# Altium PCB PCB1.PcbDoc
Units mil, origin at the board's own origin, x right, y up, seen from the top; angles counter-clockwise.
Board outline 2527.03 x 2742.03 mil, 2 copper layers (Top Layer, Bottom Layer); 62 components, 61 nets, 262 pads, 308 vias.
Unrouted connection lines stored in the file: 6.
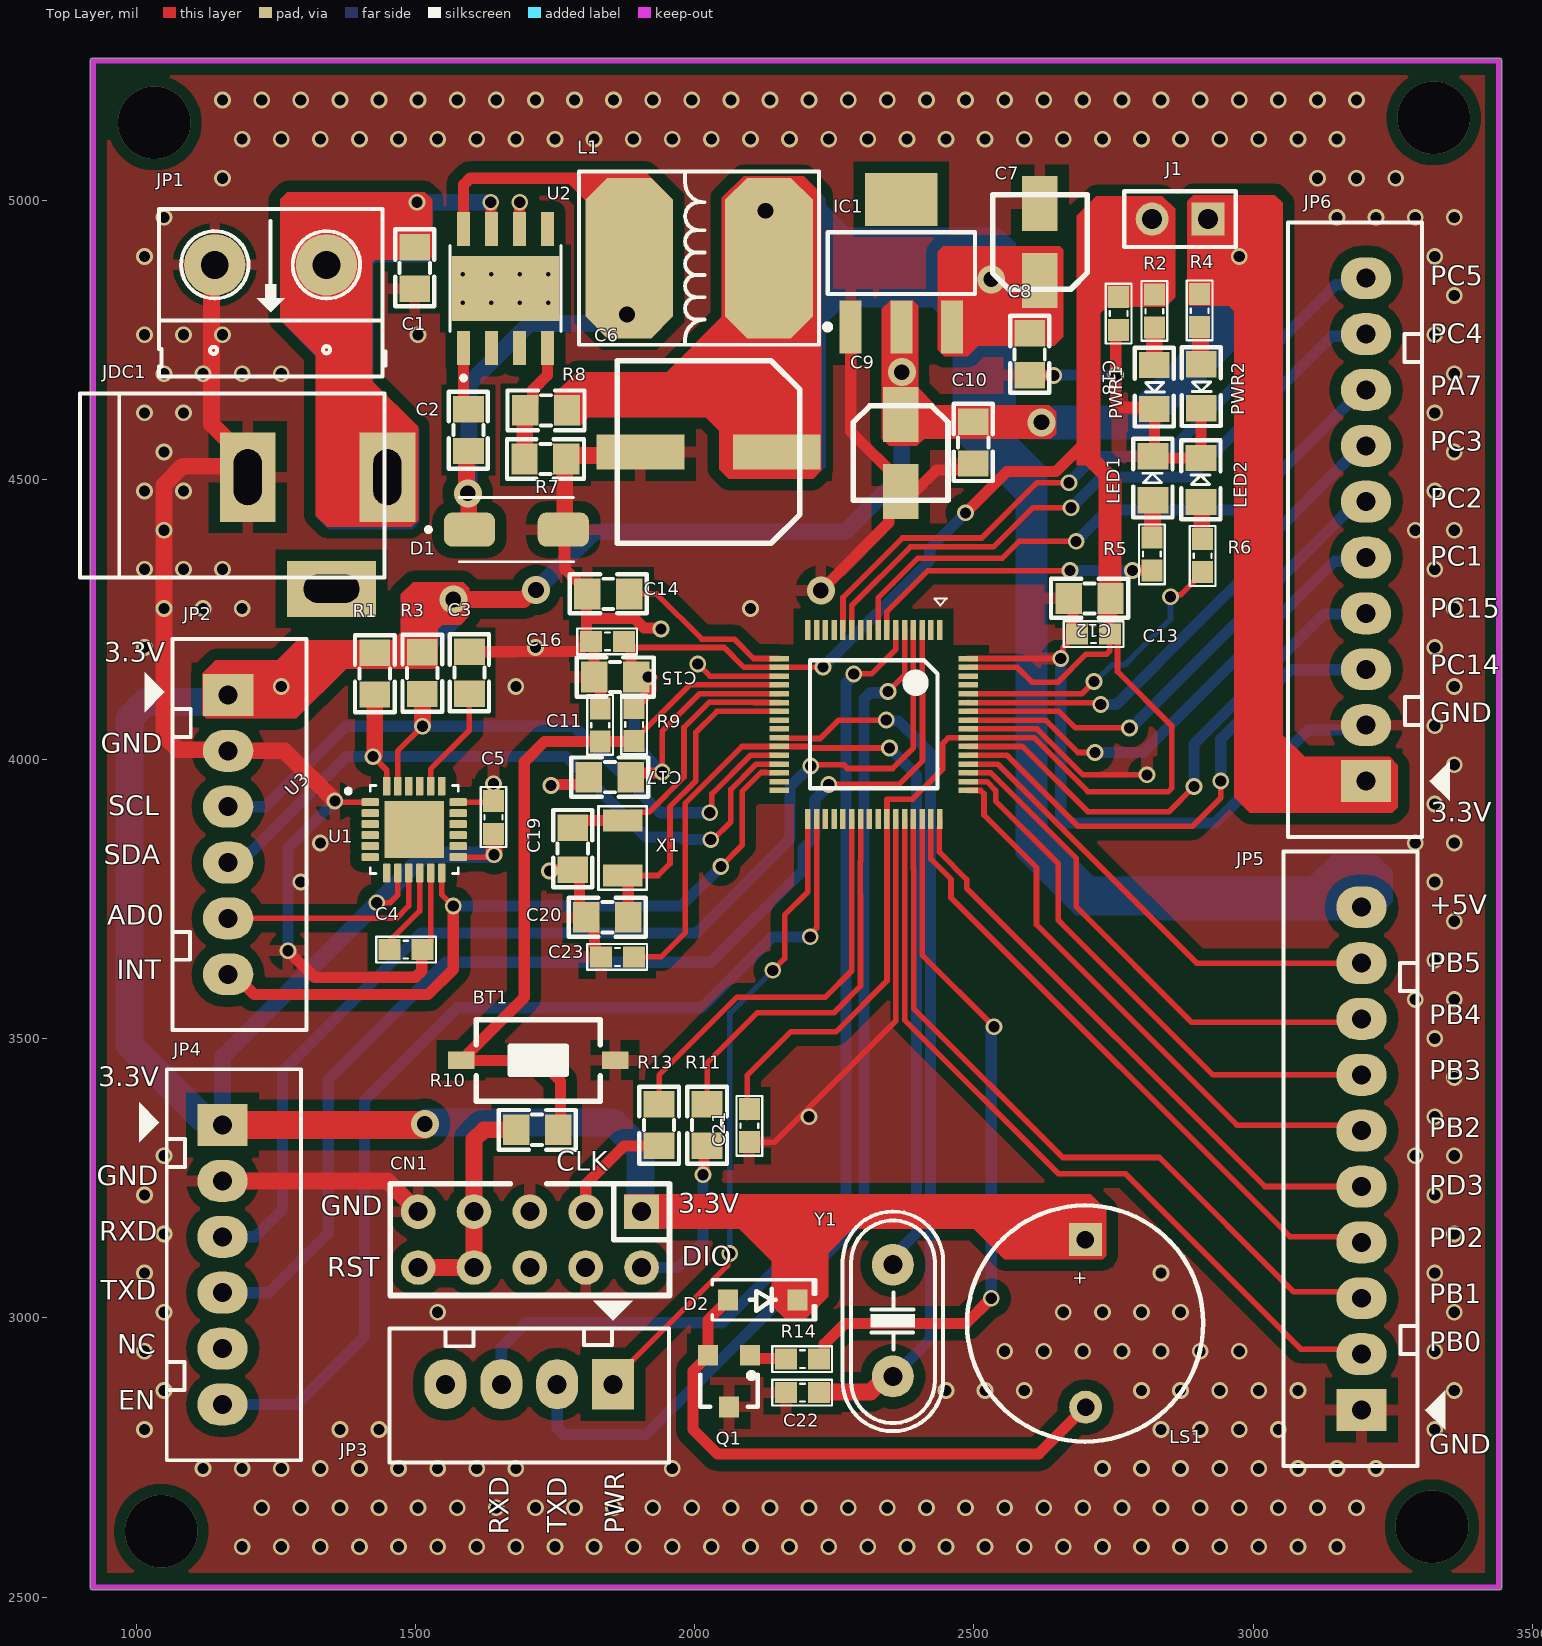
[diagram p0: Top Layer view]
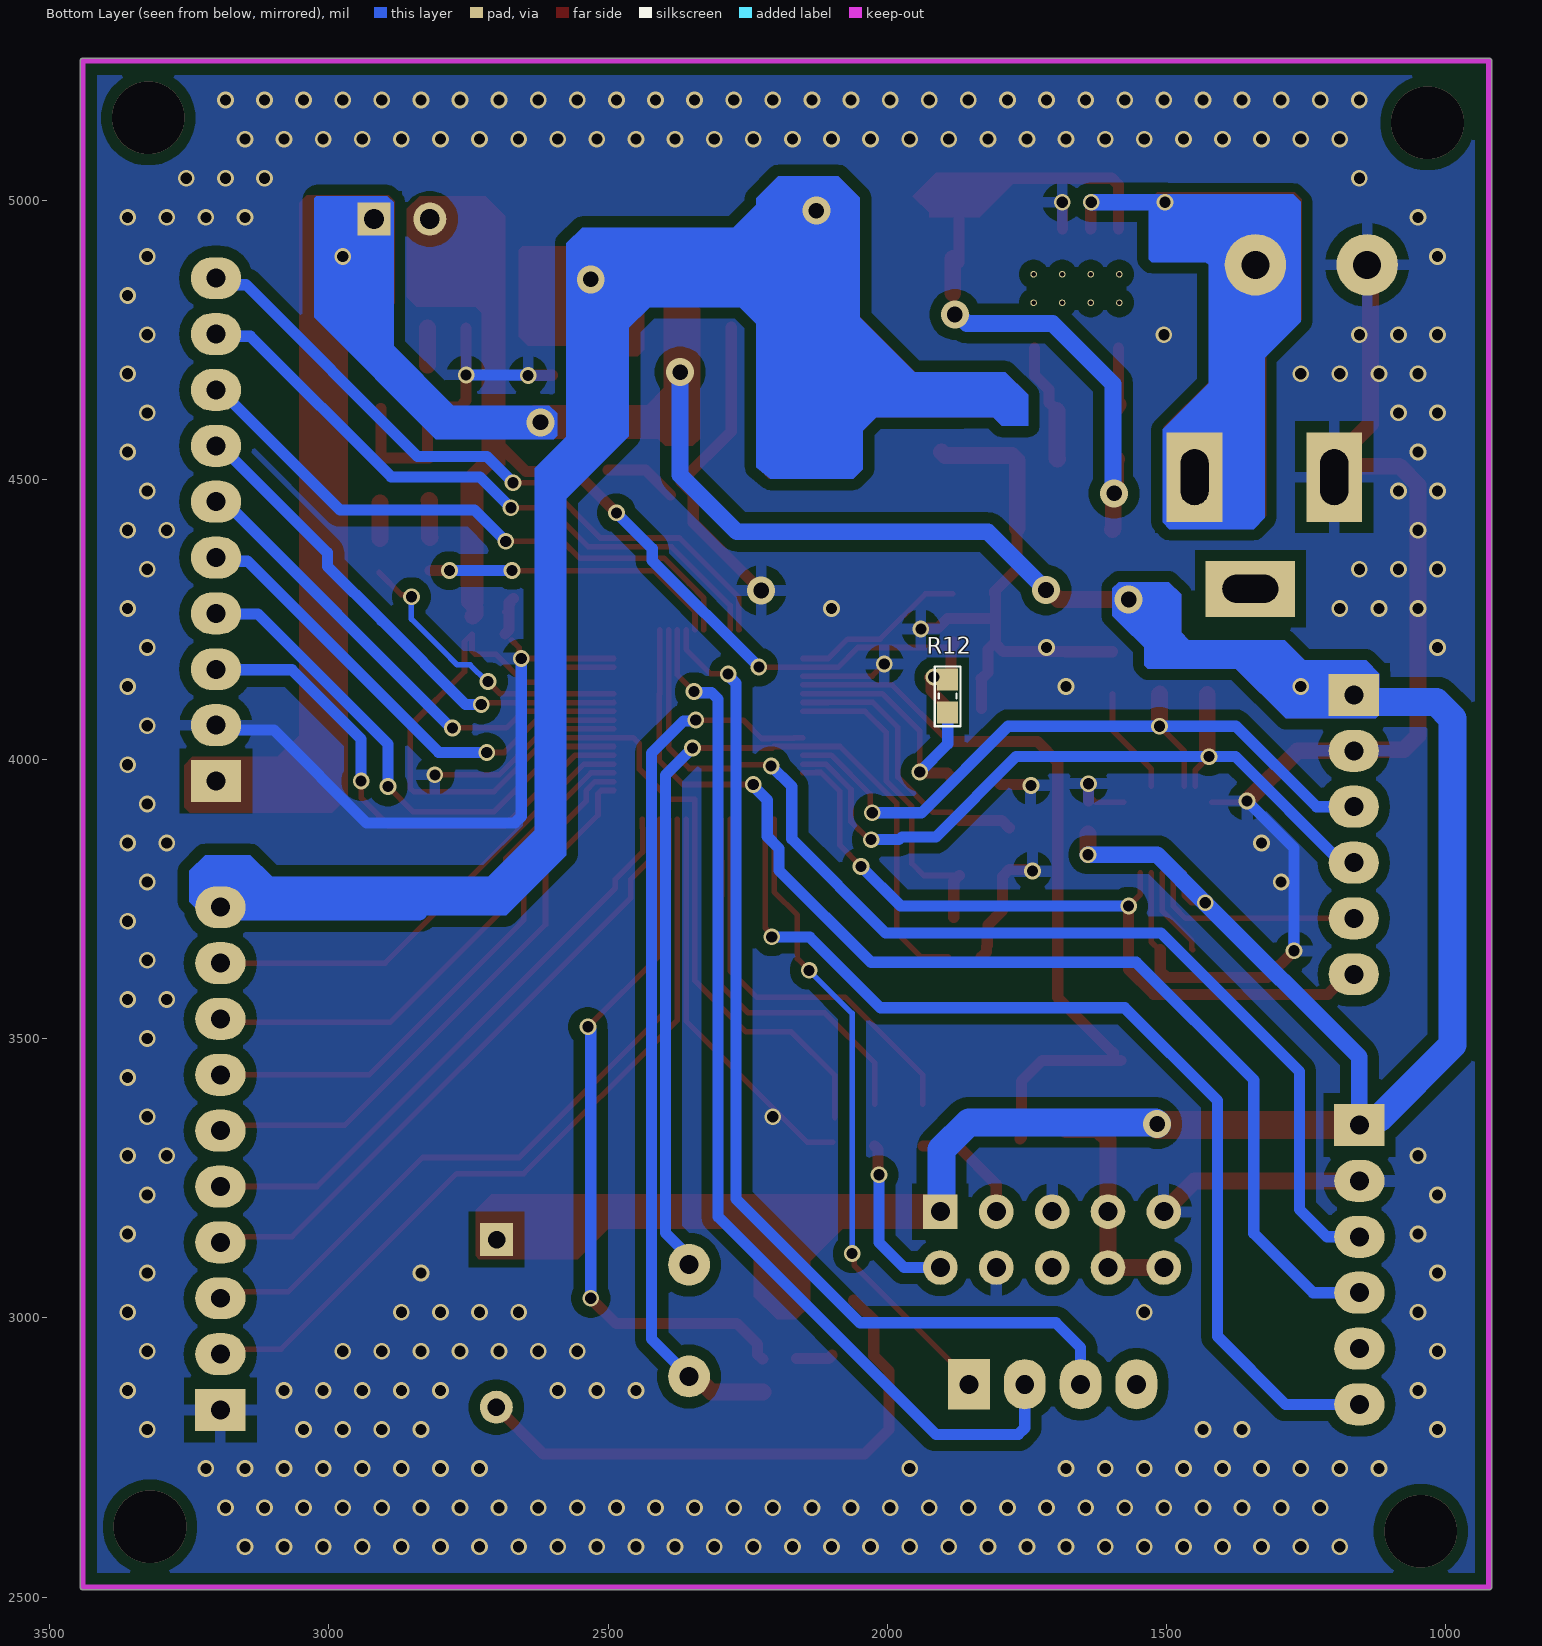
[diagram p1: Bottom Layer view, seen from below]
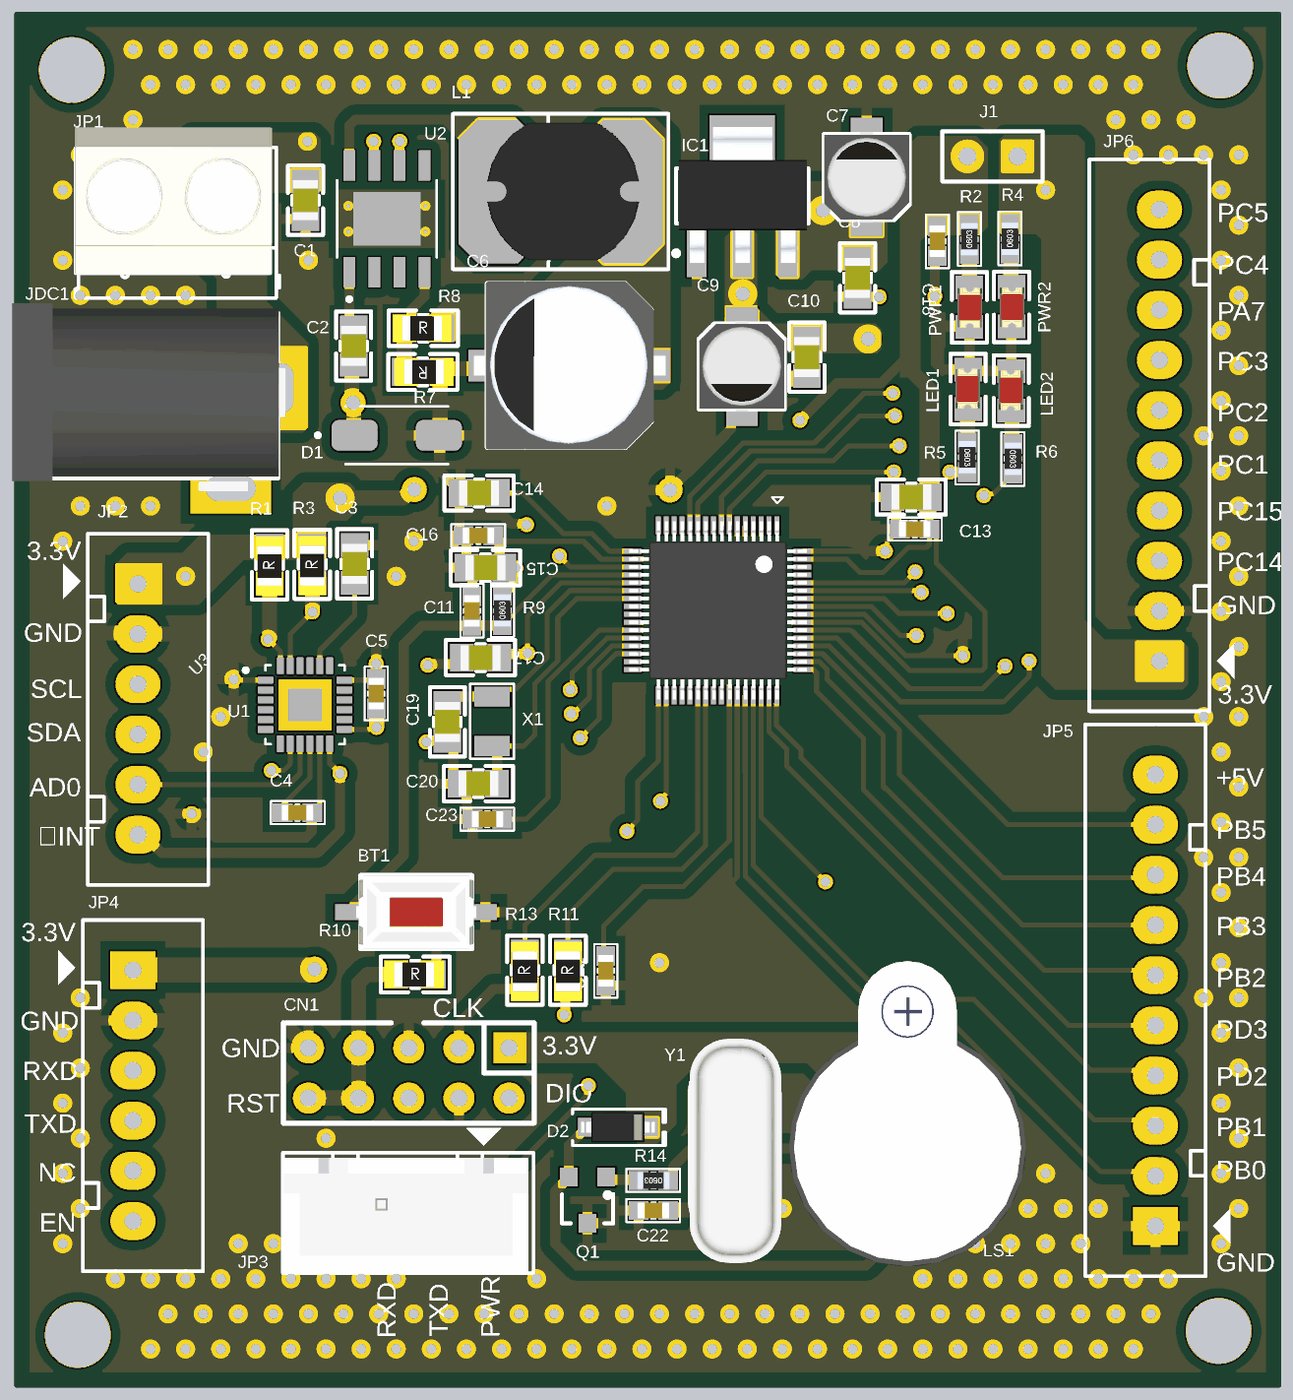
[diagram p2: 3D render of the assembled board from above, using the file's embedded part models]

## Layer stack, top to bottom
Top Solder: solder mask 0.4, Solder Resist, Dk 3.5
Top Layer: signal copper 1.4
Dielectric 1: dielectric 12.6, FR-4, Dk 4.8
Bottom Layer: signal copper 1.4
Bottom Solder: solder mask 0.4, Solder Resist, Dk 3.5

## Board outline
917.99,2518 917.98,5250 cw(c923,5250) 923,5255.02 3440,5255.02 cw(c3440,5250) 3445.01,5250 3445.02,2518 cw(c3440,2518) 3440,2512.99 923,2512.99 cw(c923,2518)

## Design rules (kind name [scope] priority, off if disabled: settings)
Clearance Clearance_9 [InNamedPolygon('GND_L02_P000')] p1: gap=10 ignorepadtopadclearanceinfootprint=FALSE except(0: Arc-Hole Track-Hole SMDPad-Hole THPad-Hole Via-Hole Fill-Hole Poly-Hole Region-Hole Text-Hole)
Clearance Clearance_8 [InNamedPolygon('GND_L02_P002')] p2: gap=20 ignorepadtopadclearanceinfootprint=FALSE
Clearance Clearance_7 [InNamedPolygon('NONET_L02_P001')] p3: gap=787.4 ignorepadtopadclearanceinfootprint=FALSE
Clearance Clearance_6 [InNamedPolygon('GND_L01_P000')] p4: gap=20 ignorepadtopadclearanceinfootprint=FALSE
Clearance Clearance_5 [InNamedPolygon('GND_L01_P001')] p5: gap=20 ignorepadtopadclearanceinfootprint=FALSE
Clearance Clearance_4 [InNamedPolygon('GND_L02_P000')] p6: gap=20 ignorepadtopadclearanceinfootprint=FALSE
Clearance Clearance_3 [InNamedPolygon('GND_L02_P000')] p7: gap=20 ignorepadtopadclearanceinfootprint=FALSE
Clearance Clearance_2 [InNamedPolygon('GND_L01_P000')] p8: gap=10 ignorepadtopadclearanceinfootprint=FALSE
Clearance Clearance_1 [InNamedPolygon('NONET_L02_P001')] p9: gap=10 ignorepadtopadclearanceinfootprint=FALSE
Clearance [All] p10: gap=5 ignorepadtopadclearanceinfootprint=FALSE
PolygonConnect PolygonConnect_17 [All vs IsNamedPolygon('GND_L02_P002')] p1: connectstyle=Relief reliefconductorwidth=20 reliefentries=4 polygonreliefangle="90 Angle" airgapwidth=20
PolygonConnect PolygonConnect_16 [All vs IsNamedPolygon('GND_L01_P000')] p2: connectstyle=Relief reliefconductorwidth=20 reliefentries=4 polygonreliefangle="90 Angle" airgapwidth=20
PolygonConnect PolygonConnect_15 [All vs IsNamedPolygon('GND_L02_P000')] p3: connectstyle=Relief reliefconductorwidth=20 reliefentries=4 polygonreliefangle="90 Angle" airgapwidth=20
PolygonConnect PolygonConnect_14 [All vs IsNamedPolygon('GND_L01_P001')] p4: connectstyle=Relief reliefconductorwidth=20 reliefentries=4 polygonreliefangle="90 Angle" airgapwidth=20
PolygonConnect PolygonConnect_13 [All vs IsNamedPolygon('GND_L02_P000')] p5: connectstyle=Relief reliefconductorwidth=20 reliefentries=4 polygonreliefangle="90 Angle" airgapwidth=20
PolygonConnect PolygonConnect_12 [All vs IsNamedPolygon('GND_L01_P001')] p6: connectstyle=Relief reliefconductorwidth=20 reliefentries=4 polygonreliefangle="90 Angle" airgapwidth=20
PolygonConnect PolygonConnect_11 [All vs IsNamedPolygon('GND_L02_P002')] p7: connectstyle=Relief reliefconductorwidth=20 reliefentries=4 polygonreliefangle="90 Angle" airgapwidth=20
PolygonConnect PolygonConnect_10 [All vs IsNamedPolygon('GND_L01_P000')] p8: connectstyle=Relief reliefconductorwidth=20 reliefentries=4 polygonreliefangle="90 Angle" airgapwidth=20
PolygonConnect PolygonConnect_9 [All vs IsNamedPolygon('GND_L01_P000')] p9: thpad.connectstyle=Relief thpad.reliefconductorwidth=10 thpad.reliefentries=4 thpad.polygonreliefangle="90 Angle" thpad.airgapwidth=20 smdpad.connectstyle=Relief smdpad.reliefconductorwidth=10 smdpad.reliefentries=4 smdpad.polygonreliefangle="90 Angle" smdpad.airgapwidth=10 via.connectstyle=Relief via.reliefconductorwidth=10 via.reliefentries=4 via.polygonreliefangle="90 Angle" via.airgapwidth=10
PolygonConnect PolygonConnect_8 [All vs IsNamedPolygon('GND_L01_P000')] p10: thpad.connectstyle=Relief thpad.reliefconductorwidth=20 thpad.reliefentries=4 thpad.polygonreliefangle="90 Angle" thpad.airgapwidth=20 smdpad.connectstyle=Relief smdpad.reliefconductorwidth=20 smdpad.reliefentries=4 smdpad.polygonreliefangle="90 Angle" smdpad.airgapwidth=20 via.connectstyle=Relief via.reliefconductorwidth=10 via.reliefentries=4 via.polygonreliefangle="90 Angle" via.airgapwidth=10
PolygonConnect PolygonConnect_7 [All vs IsNamedPolygon('GND_L01_P000')] p11: thpad.connectstyle=Relief thpad.reliefconductorwidth=20 thpad.reliefentries=4 thpad.polygonreliefangle="90 Angle" thpad.airgapwidth=20 smdpad.connectstyle=Relief smdpad.reliefconductorwidth=20 smdpad.reliefentries=4 smdpad.polygonreliefangle="90 Angle" smdpad.airgapwidth=20 via.connectstyle=Relief via.reliefconductorwidth=10 via.reliefentries=4 via.polygonreliefangle="90 Angle" via.airgapwidth=10
PolygonConnect PolygonConnect_6 [All vs IsNamedPolygon('GND_L02_P002')] p12: thpad.connectstyle=Relief thpad.reliefconductorwidth=20 thpad.reliefentries=4 thpad.polygonreliefangle="90 Angle" thpad.airgapwidth=20 smdpad.connectstyle=Relief smdpad.reliefconductorwidth=20 smdpad.reliefentries=4 smdpad.polygonreliefangle="90 Angle" smdpad.airgapwidth=20 via.connectstyle=Relief via.reliefconductorwidth=10 via.reliefentries=4 via.polygonreliefangle="90 Angle" via.airgapwidth=10
PolygonConnect PolygonConnect_5 [All vs IsNamedPolygon('GND_L01_P001')] p13: thpad.connectstyle=Relief thpad.reliefconductorwidth=20 thpad.reliefentries=4 thpad.polygonreliefangle="90 Angle" thpad.airgapwidth=20 smdpad.connectstyle=Relief smdpad.reliefconductorwidth=20 smdpad.reliefentries=4 smdpad.polygonreliefangle="90 Angle" smdpad.airgapwidth=20 via.connectstyle=Relief via.reliefconductorwidth=10 via.reliefentries=4 via.polygonreliefangle="90 Angle" via.airgapwidth=10
PolygonConnect PolygonConnect_4 [All vs IsNamedPolygon('GND_L02_P000')] p14: thpad.connectstyle=Relief thpad.reliefconductorwidth=20 thpad.reliefentries=4 thpad.polygonreliefangle="90 Angle" thpad.airgapwidth=20 smdpad.connectstyle=Relief smdpad.reliefconductorwidth=20 smdpad.reliefentries=4 smdpad.polygonreliefangle="90 Angle" smdpad.airgapwidth=20 via.connectstyle=Relief via.reliefconductorwidth=10 via.reliefentries=4 via.polygonreliefangle="90 Angle" via.airgapwidth=10
PolygonConnect PolygonConnect_3 [All vs IsNamedPolygon('GND_L02_P000')] p15: thpad.connectstyle=Relief thpad.reliefconductorwidth=20 thpad.reliefentries=4 thpad.polygonreliefangle="90 Angle" thpad.airgapwidth=20 smdpad.connectstyle=Relief smdpad.reliefconductorwidth=20 smdpad.reliefentries=4 smdpad.polygonreliefangle="90 Angle" smdpad.airgapwidth=20 via.connectstyle=Relief via.reliefconductorwidth=10 via.reliefentries=4 via.polygonreliefangle="90 Angle" via.airgapwidth=10
PolygonConnect PolygonConnect_2 [All vs IsNamedPolygon('NONET_L02_P001')] p16: thpad.connectstyle=Relief thpad.reliefconductorwidth=20 thpad.reliefentries=4 thpad.polygonreliefangle="90 Angle" thpad.airgapwidth=20 smdpad.connectstyle=Relief smdpad.reliefconductorwidth=20 smdpad.reliefentries=4 smdpad.polygonreliefangle="90 Angle" smdpad.airgapwidth=20 via.connectstyle=Relief via.reliefconductorwidth=10 via.reliefentries=4 via.polygonreliefangle="90 Angle" via.airgapwidth=10
PolygonConnect PolygonConnect_1 [All vs IsNamedPolygon('GND_L01_P000')] p17: thpad.connectstyle=Relief thpad.reliefconductorwidth=20 thpad.reliefentries=4 thpad.polygonreliefangle="90 Angle" thpad.airgapwidth=20 smdpad.connectstyle=Relief smdpad.reliefconductorwidth=20 smdpad.reliefentries=4 smdpad.polygonreliefangle="90 Angle" smdpad.airgapwidth=20 via.connectstyle=Relief via.reliefconductorwidth=10 via.reliefentries=4 via.polygonreliefangle="90 Angle" via.airgapwidth=10
PolygonConnect [All] p18: connectstyle=Relief reliefconductorwidth=10 reliefentries=4 polygonreliefangle="90 Angle" airgapwidth=10
RoutingVias [All] p1: holewidth=20 width=30 viastyle="Through Hole" minholewidth=15 minwidth=20 maxholewidth=28 maxwidth=50
SolderMaskExpansion [All] p1: expansion=4 istentingtop=FALSE
Width [All] p1: maxlimit=50 minlimit=10 preferedwidth=20
30 further rules are at their usual default settings.

## Classes and differential pairs
component class Sheet1: BT1 C1 C2 C3 C4 C5 C6 C7 C8 C9 C10 C11 C12 C13 C14 C15 C16 C17 C18 C19 C20 C22 CN1 D1 D2 IC1 J1 JDC1 JP1 JP2 JP3 JP4 JP6 L1 LED1 LED2 LS1 PWR1 PWR2 Q1 R1 R2 R3 R4 R5 R6 R7 R8 R9 R10 R11 R12 R14 U1 U2 U3 X1 Y1

## Components (designator, comment, footprint, x,y, rotation, side; value= is the part's Value field where it differs from the comment)
BT1 "Nut Nhan 2 Chan SMD 3x6x2.5" "Nut Nhan 2 Chan SMD 3x6x2.5" 1719.8,3460.8 r180 top
C1 "106" "Tu 0805" 1499.13,4879.57 r270 top
C2 "104" "tu 0805" 1595,4589 r90 top
C3 "222" "tu 0805" 1597,4155 r270 top
C4 "104" "tu 0603" 1483,3659 r0 top
C5 "104" "tu 0603" 1640,3896 r90 top
C6 "220uF" "tu nhom 8 (e)" 2025,4550 r180 top
C7 "10uF" "tu nhom 4 (b)" 2618,4926 r90 top
C8 "104" "tu 0805" 2600,4725 r270 top
C9 "10uF" "tu nhom 4 (b)" 2369,4548 r270 top
C10 "104" "tu 0805" 2499,4567 r270 top
C11 "104" "tu 0603" 1831,4061 r90 top
C12 "225" "tu 0805" 2707,4288 r0 top
C13 "104" "tu 0603" 2714,4224 r0 top
C14 "225" "tu 0805" 1845.23,4296.13 r0 top
C15 "225" "tu 0805" 1858,4147 r180 top
C16 "104" "tu 0603" 1844,4211 r180 top
C17 "225" "tu 0805" 1848,3968 r0 top
C18 "104" "tu 0603" 2759,4798 r270 top
C19 "20pF" "tu 0805" 1782,3840 r270 top
C20 "20pF" "tu 0805" 1843.87,3716.87 r180 top
C21 "104" "tu 0603" 2098,3344 r270 top
C22 "10pF" "tu 0603" 2193,2866 r180 top
C23 "10pF" "tu 0603" 1861.81,3646 r180 top
CN1 "SWD-10P (NC)" DIP-SWD-10P-2 1905,3090 r180 top
D1 "B340A-13-F" DIOM5226X240N 1681,4411 r0 top
D2 "1N4148S4" "DIODE SOD-123" 2122,3032 r0 top
IC1 "LM1117" SOT223-4N 2370,4888 r90 top value=LM317
J1 "Jumper" HDR1X2 2919,4967 r180 top
JDC1 "Jack DC5.5x2.1" DC-IN 1325,4405 r0 top
JP1 "Header 2_1" HED2 1341,4885 r180 top value="Header 2"
JP2 "JP6" CON6 1165,4115 r270 top value="Connector 6"
JP3 "JP4" CON4 1854,2881 r180 top value="Connector 4"
JP4 "JP6" CON6 1155,3345 r270 top value="Connector 6"
JP5 "JP10" CON10 3194,2835 r90 top value="Connector 10"
JP6 "JP10" CON10 3202,3961 r90 top value="Connector 10"
L1 "15uH" "Cuon Cam 7x7x5" 1858,4897 r270 top
LED1 "LED 0805" "led 0805" 2818.5,4502.7 r90 top
LED2 "LED 0805" "led 0805" 2904.5,4499.7 r90 top
LS1 "Còi Chip 3V 9.5x12MM" SPEAKER 2699.5,3140 r270 top
PWR1 "LED 0805" "led 0805" 2825,4666.54 r270 top
PWR2 "LED 0805" "led 0805" 2909,4667.54 r270 top
Q1 "C143ZEBTL" SOT23 2061.6,2886.74 r180 top value=C9014
R1 "4.7k" "tro smd 0805" 1425,4153 r90 top
R2 "10k" "TRO SMD 0603" 2823,4802 r90 top
R3 "4.7k" "tro smd 0805" 1510,4154 r90 top
R4 "10k" "TRO SMD 0603" 2904,4803 r90 top
R5 "10k" "TRO SMD 0603" 2818.5,4367.24 r270 top
R6 "10k" "TRO SMD 0603" 2909.5,4364.24 r270 top
R7 "3.3k" "tro smd 0805" 1733,4535 r180 top
R8 "10k" "tro smd 0805" 1734,4627 r0 top
R9 "10k" "tro smd 0603" 1891.81,4062 r90 top
R10 "100R" "tro smd 0805" 1718,3339 r0 top
R11 "100R" "tro smd 0805" 2020,3345 r90 top
R12 "0" "tro smd 0603" 1892,4113 r270 bottom
R13 "100R" "tro smd 0805" 1934,3345 r90 top
R14 "100R" "tro smd 0603" 2193,2926 r180 top
U1 "MPU6050" IC_MPU6050 1498,3874 r0 top
U2 "TPS5430DDA" VREG_LM5017MR/NOPB 1661.41,4842.59 r90 top
U3 "HT32F52367_LQFP64" HT_LQFP64 2318.47,4053.61 r180 top
X1 "32768" TXC_T10 1871,3841 r270 top
Y1 "8MHz" XT2 2355,2995 r90 top

## Footprints (in the part's own frame and the unit in brackets; to place one, negate y for a bottom-side part, rotate by r counter-clockwise, add the part's x,y. Pads: shape width x height; smd on the part's side, far side on the other; paste and mask are expansions set on the pad)
CON4 [mil] "CON4"
  rect 75x90 hole 34: 1(0,0)
  oval 75x90 hole 34: 2(100,0) 3(200,0) 4(300,0)
  silkscreen extent -100,-150 400,140, body extent -90,-90 398,136, height 276
CON6 [mil] "CON6"
  rect 75x90 hole 34: 1(0,0)
  oval 75x90 hole 34: 2(100,0) 3(200,0) 4(300,0) 5(400,0) 6(500,0)
  silkscreen extent -100,-150 600,140
CON10 [mil] "CON10"
  rect 75x90 hole 34: 1(0,0)
  oval 75x90 hole 34: 2(100,0) 3(200,0) 4(300,0) 5(400,0) 6(500,0) 7(600,0) 8(700,0) 9(800,0) 10(900,0)
  silkscreen extent -100,-150 1000,140
"Cuon Cam 7x7x5" [mm] "Cuon Cam 7x7x5"
  oct 7.3x4 smd: 1(0,0.635) 2(0,6.985)
  silkscreen extent -3.94,-1.65 3.94,9.27, body extent -3.5,0.07 3.5,7.8, height 5.02
DC-IN [mil] "Jac DC input"
  rect 100x160 hole 50 slot 100 at 90 deg: 1(125,100) 2(-125,100)
  rect 160x100 hole 50 slot 100 at 0 deg: 3(25,-100)
  silkscreen extent -425,-80 120,250, body extent -410,-105 134,269, height 434
"DIODE SOD-123" [mm]
  rect 0.9x0.95 smd: 1(-1.575,0) 2(1.575,0)
  silkscreen extent -2.3,-0.92 2.41,0.92, body extent -1.86,-0.78 1.86,0.77, height 1.35
DIOM5226X240N [mm]
  rrect50% 2.33x1.55 smd: A(2.135,0) C(-2.135,0)
  silkscreen extent -4.1,-1.46 2.6,1.46
DIP-SWD-10P-2 [mil]
  rect 62x62 hole 34: 1(0,-100)
  round 62 hole 34: 2(0,0) 3(100,-100) 4(100,0) 5(200,-100) 6(200,0) 7(300,-100) 8(300,0) 9(400,-100) 10(400,0)
  silkscreen extent -50,-150 450,50
HDR1X2 [mm]
  rect 1.5x1.5 hole 0.9: 1(0,0)
  round 1.5 hole 0.9: 2(2.54,0)
  silkscreen extent -1.27,-1.27 3.81,1.27
HED2 [mil] "Header 2, 2 pin, hight 300mil, Pin to Pin 200, Colour Green"
  round 110 hole 50: 1(0,0) 2(200,0)
  silkscreen extent -106,-100 300,200, body extent -92,-140 302,155, height 394
HT_LQFP64 [mm]
  rect 0.25x0.9 smd: 1(-3.057,-4.516) 2(-2.657,-4.516) 3(-2.257,-4.516) 4(-1.857,-4.516) 5(-1.457,-4.516) 6(-1.057,-4.516) 7(-0.657,-4.516) 8(-0.257,-4.516) 9(0.143,-4.516) 10(0.543,-4.516) 11(0.943,-4.516) 12(1.343,-4.516) 13(1.743,-4.516) 14(2.143,-4.516) 15(2.543,-4.516) 16(2.943,-4.516) 33(2.943,4.084) 34(2.543,4.084) 35(2.143,4.084) 36(1.743,4.084) 37(1.343,4.084) 38(0.943,4.084) 39(0.543,4.084) 40(0.143,4.084) 41(-0.257,4.084) 42(-0.657,4.084) 43(-1.057,4.084) 44(-1.457,4.084) 45(-1.857,4.084) 46(-2.257,4.084) 47(-2.657,4.084) 48(-3.057,4.084)
  rect 0.9x0.25 smd: 17(4.243,-3.216) 18(4.243,-2.816) 19(4.243,-2.416) 20(4.243,-2.016) 21(4.243,-1.616) 22(4.243,-1.216) 23(4.243,-0.816) 24(4.243,-0.416) 25(4.243,-0.016) 26(4.243,0.384) 27(4.243,0.784) 28(4.243,1.184) 29(4.243,1.584) 30(4.243,1.984) 31(4.243,2.384) 32(4.243,2.784) 49(-4.357,2.784) 50(-4.357,2.384) 51(-4.357,1.984) 52(-4.357,1.584) 53(-4.357,1.184) 54(-4.357,0.784) 55(-4.357,0.384) 56(-4.357,-0.016) 57(-4.357,-0.416) 58(-4.357,-0.816) 59(-4.357,-1.216) 60(-4.357,-1.616) 61(-4.357,-2.016) 62(-4.357,-2.416) 63(-4.357,-2.816) 64(-4.357,-3.216)
  silkscreen extent -3.37,-5.95 2.84,2.68, body extent -4.58,-4.72 4.42,4.28, height 1.4
IC_MPU6050 [mm]
  rrect25% 0.8x0.35 smd: 1(-2,1.25) 2(-2,0.75) 3(-2,0.25) 4(-2,-0.25) 5(-2,-0.75) 6(-2,-1.25) 13(2,-1.25) 14(2,-0.75) 15(2,-0.25) 16(2,0.25) 17(2,0.75) 18(2,1.25)
  rrect25% 0.35x0.85 smd: 7(-1.25,-1.975) 8(-0.75,-1.975) 9(-0.25,-1.975) 10(0.25,-1.975) 11(0.75,-1.975) 12(1.25,-1.975) 19(1.25,1.975) 20(0.75,1.975) 21(0.25,1.975) 22(-0.25,1.975) 23(-0.75,1.975) 24(-1.25,1.975)
  rect 2.7x2.6 smd paste-2: 25(0,0)
  silkscreen extent -3.1,-2 2,2
"led 0805" [mm]
  rect 1.2x1.4 smd: 1(-0.996,-0.051) 2(1.004,-0.051)
  silkscreen extent -1.78,-0.94 1.8,0.84, body extent -0.98,-0.65 1.04,0.6, height 1.1
"Nut Nhan 2 Chan SMD 3x6x2.5" [mm] "Switch SMD type"
  rect 1.2x0.8 smd: 1(-3.5,0) 2(3.5,0)
  silkscreen extent -2.82,-1.85 2.82,1.85, body extent -3.05,-1.85 3.05,1.85, height 2.5
SOT23 [mm] "SOT-23; 3 Leads; Body 3.1 x 2.5 mm, inc. leads (LxW max), Alternate Lead Configuration"
  rect 0.9x0.95 smd: 1(-0.95,-1.175) 2(0,1.175) 3(0.95,-1.175)
  silkscreen extent -1.3,-0.38 1.3,1.18
SOT223-4N [mm] "SOT223, 4-Leads, Body 6.5x3.5mm, Pitch 2.3mm, Lead Span 7mm, IPC Medium Density"
  rect 2.4x1 smd: 1(-2.9,2.3) 2(-2.9,0) 3(-2.9,-2.3)
  rect 2.4x3.3 smd: 4(2.9,0)
  silkscreen extent -3.02,-3.35 1.4,3.47, body extent -3.39,-3.27 3.5,3.23, height 1.72
SPEAKER [mm]
  rect 1.5x1.5 hole 0.8: 1(0,0)
  round 1.5 hole 0.8: 2(7.62,0.013)
  silkscreen extent -1.55,-5.38 9.18,5.36, body extent -5.67,-6 9.78,6, height 3.99
"TRO SMD 0603" [mm]
  rect 1x0.95 smd mask+0.076: 1(-0.75,0) 2(0.75,0)
  silkscreen extent -1.35,-0.58 1.37,0.58, body extent -0.82,-0.42 0.82,0.43, height 0.44
"tro smd 0603" [mm] "Chip Capacitor, 2-Leads, Body 1,60x0,80mm, IPC Medium Density"
  rect 1x0.95 smd mask+0.076: 1(-0.75,0) 2(0.75,0)
  silkscreen extent -1.35,-0.58 1.37,0.58, body extent -0.82,-0.42 0.82,0.43, height 0.44
"tro smd 0805" [mm]
  rect 1.2x1.4 smd: 1(-0.946,-0.061) 2(0.954,-0.061)
  silkscreen extent -1.75,-0.97 1.75,0.84, body extent -1.56,-0.76 1.44,0.64, height 0.53
"tu 0603" [mm]
  rect 1x0.95 smd mask+0.076: 1(-0.75,0) 2(0.75,0)
  silkscreen extent -1.35,-0.58 1.37,0.58, body extent -0.8,-0.4 0.8,0.4, height 0.9
"Tu 0805" [mm] "Compoment SMD 80x50mil"
  rect 1.2x1.4 smd: 1(-0.946,-0.003) 2(0.954,-0.003)
  silkscreen extent -1.75,-0.89 1.75,0.89, body extent -1.01,-0.64 1.01,0.63, height 0.61
"tu 0805" [mm] "Compoment SMD 80x50mil"
  rect 1.2x1.4 smd: 1(-0.946,-0.003) 2(0.954,-0.003)
  silkscreen extent -1.75,-0.89 1.75,0.89, body extent -1.01,-0.64 1.01,0.63, height 0.61
"tu nhom 4 (b)" [mm]
  rect 2.5x1.6 smd: 1(-1.75,0) 2(1.75,0)
  silkscreen extent -2.15,-2.15 2.15,2.15, body extent -2.31,-2.15 2.29,2.15, height 3.91
"tu nhom 8 (e)" [mm]
  rect 4x1.6 smd: 1(-3.1,0) 2(3.1,0)
  silkscreen extent -4.15,-4.15 4.15,4.15, body extent -4.88,-4.25 4.82,4.25, height 10.5
TXC_T10 [mm]
  rect 1x1.8 smd: 1(-1.25,0) 2(1.25,0)
  silkscreen extent -1.9,-1.1 1.9,1.1
VREG_LM5017MR/NOPB [mm]
  rrect5% 1.55x0.6 smd mask+0: 1(-2.7,1.905) 2(-2.7,0.635) 3(-2.7,-0.635) 4(-2.7,-1.905) 5(2.7,-1.905) 6(2.7,-0.635) 7(2.7,0.635) 8(2.7,1.905)
  rect 2.95x4.9 smd paste-3 mask+0: 9(0,0)
  round 0.3 hole 0.2: 10(-0.65,1.95) 11(0.65,1.95) 12(-0.65,0.65) 13(0.65,0.65) 14(-0.65,-0.65) 15(0.65,-0.65) 16(-0.65,-1.95) 17(0.65,-1.95)
  silkscreen extent -4.17,-2.52 1.95,2.52
XT2 [mil] "Footpin for Crystal 2 pin"
  round 75 hole 34: 1(-100,0) 2(100,0)
  silkscreen extent -198,-90 195,90, body extent -233,-93 213,90, height 138

## Part data
C1: library part "Tu 0805 106 16V 10%", "Dán", Chung_Loai=Dán, Don_Vi=Con, Ma_Hang=MH004553, So_Chan=2, Ten_Linh_Kien="Tụ 0805 106-10uF 10% 16V"
C2 C8 C10: library part "Tu 0805 104 50V 10%", "Dán", Chung_Loai=Dán, Don_Vi=Con, Ma_Hang=MH004551, So_Chan=2, Ten_Linh_Kien="Tụ 0805 104-100nF 10% 50V"
C3: library part "Tu 0805 222 50V 10%", "Dán", Chung_Loai=Dán, Don_Vi=Con, Ma_Hang=MH004557, So_Chan=2, Ten_Linh_Kien="Tụ 0805 222-2.2nF 10% 50V"
C4 C5 C11 C13 C16 C18 C21 C22 C23: library part "Tu 0603 104 50V 10%", "Dán", Chung_Loai=Dán, Don_Vi=Con, Ma_Hang=MH004568, So_Chan=2, Ten_Linh_Kien="Tụ 0603 104-100nF 10% 50V"
C6: library part "Tu Nhom 220uF 10V", "Dán", Chung_Loai=Dán, Don_Vi=Con, Ma_Hang=MH004021, So_Chan=2, Ten_Linh_Kien="Tụ Nhôm 220uF 10V"
C7 C9: library part "Tu Nhom 10uF 16V", "Dán", Chung_Loai=Dán, Don_Vi=Con, Ma_Hang=MH001458, So_Chan=2, Ten_Linh_Kien="Tụ Nhôm 10uF 16V 4x5MM"
C12 C14 C15 C17: library part "Tu 0805 225 25V 10%", "Dán", Chung_Loai=Dán, Don_Vi=Con, Ma_Hang=MH007483, So_Chan=2, Ten_Linh_Kien="Tụ 0805 225-2.2uF 25V 10%"
C19 C20: library part "Tu 0805 20pF 50V 10%", "Dán", Chung_Loai=Dán, Don_Vi=Con, Ma_Hang=MH004558, So_Chan=2, Ten_Linh_Kien="Tụ 0805 20P 10% 50V"
CN1: library part DIP-SWD-10P, "SWD Connector", Package=DIP-SWD-10P
D1: "Diode Schottky 40V 3A Surface Mount SMA", Package="DO-214 Diodes Inc.", Availability=Unavailable, MF="Diodes Inc.", MP=B340A-13-F, Price=None, SnapEDA_Link=https://www.snapeda.com/parts/B340A-13-F/Diodes%20Inc./view-part/78704/?ref=snap
D2: library part "Diode S4", "Dán", Chung_Loai=Dán, Don_Vi=Con, Ma_Hang=MH005519, Ten_Linh_Kien="Diode S4 SOD123 ( 1N5819 SOD123)"
IC1: "Available in 1.8V, 2.5V, 2.85V, 3.3V, 5V, and  Adjustable Versions"
J1: "Jumper Wire", Package=HDR1X2
JDC1: library part Jac_DC, "Cắm", Chung_Loai=Cắm, Don_Vi=Con, Ma_Hang=MH000923, Ten_Linh_Kien="Jack DC5.5x2.1MM DC5501"
JP1: "Header, 2-Pin", Manufacturer="Generic Components", Class=Connector
JP2 JP4: library part Con6, "Connector 6"
JP3: library part Con4, "Connector 4"
JP5 JP6: library part Con10, "Connector 10"
L1: library part "CUON CAM 47uH SMD", "Dán", Chung_Loai=Dán, Don_Vi=Con, Ma_Hang=MH004211, Ten_Linh_Kien="Cuộn Cảm 47uH 7x7x4MM CD74R"
LED1 LED2: library part "LED 0805 Trang", "Dán", Chung_Loai=Dán, Don_Vi=Con, Ma_Hang=MH002946, Ten_Linh_Kien="LED 0805 Màu Trắng ( White)"
LS1: library part "Coi Chip 5V", "Cắm", Chung_Loai=Cắm, Don_Vi=Con, Ma_Hang=MH000902, Ten_Linh_Kien="Còi Chip 5V 9.5x12MM"
PWR1 PWR2: library part "LED 0805 Do", "Dán", Chung_Loai=Dán, Don_Vi=Con, Ma_Hang=MH000897, Ten_Linh_Kien="LED 0805 Màu Đỏ (Red)"
Q1: library part "C1815 HF SMD", "NPN transistor"
R1 R3: library part "Tro 0805 5% 4.7k", "Dán", Chung_Loai=Dán, Don_Vi=Con, Ma_Hang=MH005307, So_Chan=2, Ten_Linh_Kien="Trở 0805 5% 4.7k"
R2 R4 R5 R6: library part "Tro 0603 1% 10k", "Dán", Chung_Loai=Dán, Don_Vi=Con, Ma_Hang=MH006333, So_Chan=2, Ten_Linh_Kien="Trở 0603 1% 10k"
R7: library part "Tro 0805 1% 3.3k", "Dán", Chung_Loai=Dán, Don_Vi=Con, Ma_Hang=MH005472, So_Chan=2, Ten_Linh_Kien="Trở 0805 1% 3.3k"
R8: library part "Tro 0805 5% 10k", "Dán", Chung_Loai=Dán, Don_Vi=Con, Ma_Hang=MH005239, So_Chan=2, Ten_Linh_Kien="Trở 0805 5% 10k"
R9 R12: library part "Tro 0603 5% 10k", "Dán", Chung_Loai=Dán, Don_Vi=Con, Ma_Hang=MH006316, So_Chan=2, Ten_Linh_Kien="Trở 0603 5% 10k"
R10 R11 R13: library part "Tro 0805 5% 100R", "Dán", Chung_Loai=Dán, Don_Vi=Con, Ma_Hang=MH005251, So_Chan=2, Ten_Linh_Kien="Trở 0805 5% 100R"
R14: library part "Tro 0603 5% 100R", "Dán", Chung_Loai=Dán, Don_Vi=Con, Ma_Hang=MH006315, So_Chan=2, Ten_Linh_Kien="Trở 0603 5% 100R"
U1: "Accelerometer, Gyroscope, 6 Axis Sensor IÂ²C Output", Package="VFQFN-24 TDK InvenSense", Availability=Unavailable, MF="TDK InvenSense", MP=MPU6050, Price=None, SnapEDA_Link=https://www.snapeda.com/parts/MPU6050/TDK%20InvenSense/view-part/3605706/?ref=snap
U2: "5.5Vè‡³36Vè¾“å…¥ï¼Œ3Aï¼Œ500kHzé™åŽ‹è½¬æ¢å™¨", Package="HSOIC-8 Texas Instruments", Availability=Unavailable, DigiKey-Purchase-URL=https://snapeda.com/shop?store=DigiKey&id=226174, MF="Texas Instruments", Mouser-Purchase-URL=https://snapeda.com/shop?store=Mouser&id=226174, MP=TPS5430DDA, Price=None, SnapEDA_Link=https://www.snapeda.com/parts/TPS5430DDA/Texas%20Instruments/view-part/226174/?ref=snap, Texas_Instruments-Purchase-URL=https://snapeda.com/shop?store=Texas+Instruments&id=226174
X1: library part XTAL_TXC-T10, "SMD XTAL", Package=TXC_T10
Y1: library part "Thach Anh 8Mhz DIP", "Cắm", Chung_Loai=Cắm, Don_Vi=Con
BT1: Ma_Hang=MH001036, Ten="Nút Nhấn 2 Chân 3x6x2.5MM SMD"

## Via types
v1: diameter 30, hole 20, Top Layer to Bottom Layer, 294 vias
v2: diameter 50, hole 28, Top Layer to Bottom Layer, 10 vias
v3: diameter 129.92, hole 129.92, Top Layer to Bottom Layer, 4 vias

## Nets (pads, with @x,y where several pads share a name; then routed paths per layer and width w, separated by ;. In a path a pad name is that pad's centre, name@x,y a point inside that pad or via, vN(x,y) a via of type N, cw(c..) or ccw(c..) an arc to the next point about the centre after c; other vN are vias at no path point)
3.3V: C5.1 C9.1 C10.1 CN1.1 D2.2 IC1.2 J1.1 JP2.1 JP4.1 JP6.1 LS1.1 R1.2 R3.2 R4.2 U1.8 U1.13 | length 7274.2
  Top Layer w10: v1(1431,3743) 1455,3743 1468.47,3756.47 U1.8 ; U1.13 1631.38,3824.79 1635.59,3829 v1(1641,3829)
  Top Layer w20: C10.1 2502.8,4604.23 2503.03,4604 2620,4604 v2(2621,4603) ; R4.2 2904,4882.99 2919,4897.99 J1.1
  Top Layer w30: JP2.1 1299,4115 ; 1302,4139 1360,4197 1495.97,4197 R3.2@1502.39,4190.57 ; R3.2 1512.39,4251.39 1547,4286 v2(1568,4286) 1693.59,4286 1710.59,4303 v2(1716,4303) ; v1(1641,3829) C5.1@1641,3866.47 ; CN1.1@1905,3189 2150,3189 2180,3189 ; D2.2@2181.29,3030.36 2181.29,3049.92 2180,3051.21 2180,3189 ; IC1.2 2370.5,4773.33 2370.5,4693.5 v2(2371,4693) 2373,4691 2373,4618.5 2385.5,4606 2501.03,4606 C10.1@2502.8,4604.23 ; LS1.1 2603.51,3140 2554.51,3189 2180,3189 ; R4.2 2904,4831.54 2907.7,4827.84 2973.16,4827.84 3004,4797 3004,4016 3060,3960 JP6.1@3200,3960
  Top Layer w50: JP4.1 1515,3345 v2(1517,3347)
  Bottom Layer w20: v2(2621,4603) 2701,4603 ; 2918.19,4820.19 2918.19,4966.19 J1.1
  Bottom Layer w30: JP4.1 1155,3467 v1(1431,3743) 1517,3829 v1(1641,3829) ; v2(1716,4303) 1820,4407 2269,4407 2371,4509 v2(2371,4693)
  Bottom Layer w50: JP4.1 1142.5,3357.5 1119.29,3357.5 988,3488.79 988,4073.21 1017.29,4102.5 1152.5,4102.5 JP2.1 ; v2(1517,3347) 1520,3350 1854,3350 1903,3301 1903,3192 CN1.1
  other v1: 1260,4130 2975,4900
5V: C6.1 C7.1 C8.1 IC1.3 JP5.10 L1.2 R8.2 | length 1923.8
  Top Layer w20: R8.2@1770.9,4623.93 R8.2 ; C8.1@2618,4763.8 2618,4772.43 2618,4864.2 C7.1@2620,4866.2
  Top Layer w30: R8.2 1771.57,4628.54 1780.2,4637.17 1784.13,4637.17 1807.97,4661 2133,4661 ; L1.2 2133,4661 ; C6.1 2133,4564.05 2133,4661 ; C6.1@2170.5,4550 C6.1@2187,4533.5 ; IC1.3 2465.24,4778.51 2465.24,4806.07 2514.34,4855.17 v2@2527.17,4855.17 ; v2(2531,4859) 2534.83,4855.17 2534.83,4846.98 2605.44,4776.36 2605.44,4772.43 2614.06,4763.8 C8.1@2618,4763.8
  Bottom Layer w30: v2(2127,4982) 2214,4895 2495,4895 v2(2531,4859) ; 2838,3726 3146.43,3726 3146.82,3726.39 3185.39,3726.39 JP5.10
AD0: JP2.5 U1.9 | length 391.4
  Top Layer w10: JP2.5 1466,3715 1488.16,3737.16 U1.9
BUZ_IN: R14.1 U3.46 | length 1277.7
  Top Layer w10: U3.46 2407.32,3649.68 v1(2536,3521)
  Top Layer w20: R14.1 2223.51,2926 2232.21,2934.7 2232.21,2953.21 2269,2990 2486,2990 v1(2531,3035)
  Bottom Layer w20: v1(2531,3035) 2531,3516 v1(2536,3521)
EN: JP4.6 U3.34 | length 1866.7
  Top Layer w10: v1(2207,3682) 2207,3686.33 2218.53,3697.86 U3.34@2218.53,3898
  Bottom Layer w20: JP4.6 1287,2845 1409,2967 1409,3389 1575,3555 2012,3555 2139,3682 v1(2207,3682)
F_NRST: BT1.2 C11.1 R9.1 R10.2 U3.20 | length 1389.6
  Top Layer w10: R9.1 1891.81,4033.46 1991.35,4133 U3.20
  Top Layer w20: BT1.2 BT1.2@1589.88,3460.8 ; R10.2@1762.57,3320.61 1760,3323.18 1760,3424 1723.2,3460.8 BT1.2@1589.88,3460.8 ; R9.1 1891.31,4031.97 1831.5,4031.97 C11.1 1731.47,4031.47 1695,3995 1695,3573.8 1595.63,3474.42 1595.63,3466.55 BT1.2@1589.88,3460.8
GND: BT1.1 C1.2 C3.1 C4.2 C5.2 C6.2 C7.2 C8.2 C9.2 C10.2 C11.2 C12.1 C13.1 C14.1 C15.2 C16.2 C17.1 C18.2 C19.2 C20.2 C21.2 C22.2 C23.2 CN1.4 CN1.5 CN1.9 D1.A IC1.1 JDC1.2 JP1.2 JP2.2 JP4.2 JP5.1 JP6.2 LED1.2 LED2.2 PWR1.2 PWR2.2 Q1.2 R7.1 U1.1 U1.11 U1.18 U2.6 U3.19 U3.43 U3.56 U3.64 | length 7738.9
  Top Layer w10: v1(1356,3925) 1357.79,3923.21 U1.1 ; C4.2 1513.51,3659 1527.53,3673.02 U1.11 ; U1.18 1627.3,3923.21 C5.2@1640,3935.91 ; C11.2 1831.64,4091.17 1832.28,4091.81 C15.2@1832.28,4144 ; v1(2005.5,4170.5) 2027.25,4148.75 U3.19 ; C21.2 2143.47,3314.47 2360.08,3531.08 U3.43 ; U3.56 2612.95,4054.26 2695.21,3972 v1(2810,3972) ; U3.64 v1(2655.33,4180.24) ; v1(2655.33,4180.24) 2659.15,4184.07 2659.15,4199.67 2672.4,4212.92 C13.1@2673.39,4212.92 ; C12.1@2670.47,4277 2671.46,4277 2677.12,4271.33 C12.1@2685.16,4263.3
  Top Layer w20: v1(1272,3657) 1320,3609 1499.83,3609 1511.54,3620.72 C4.2@1511.54,3659 ; C3.1 1681.23,4192.23 ; C5.2 1640,3935.91 v1(1640,3956) ; 1682,4193 1792.67,4193 C16.2@1806.47,4206.8 ; U2.6 1686.7,4949.19 1686.7,4994.7 v1@1687,4995 ; v1(1740,3800) 1740,3802.43 C19.2 1794,3790.29 1794,3729.3 C20.2 1819.92,3703.38 1819.92,3688.81 1821,3687.73 1821,3666.42 1822.59,3664.82 1822.59,3654.7 1831.3,3646 C23.2 ; v1(1743,3953) 1744.91,3954.91 1797.69,3954.91 C17.1@1806.64,3963.87 ; D1.A@1767.64,4413.59 1767.64,4340.3 1808,4299.94 C14.1 ; C16.2@1806.47,4209.83 1819.92,4196.38 1819.92,4155.38 1831.3,4144 1832.28,4144 1831.64,4143.36 C11.2@1831.64,4091.17 ; C16.2@1806.47,4211 1806.47,4252 ; C14.1@1806.47,4296.69 1806.47,4252 ; v1(1940,4233) 1938.09,4234.91 1909.21,4234.91 1892.13,4252 1806.47,4252 ; v2(2226,4302) 2347.5,4423.5 2347.5,4475.32 2369,4496.82 2279.45,4586.37 IC1.1 ; C9.2@2388,4472.93 2433.07,4518 C10.2@2500,4518 ; C8.2 2600.08,4687.21 2642.79,4687.21 v1(2643,4687) ; C12.1 2677.12,4280.52 2677.12,4271.33 2677.12,4231.35 C13.1 ; C18.2@2754,4771.47 v1(2754,4688) 2754,4642 2766,4630 PWR1.2@2823,4630 ; LED1.2 2820.5,4539.24 LED1.2@2823,4539.24 ; PWR1.2 LED1.2@2823,4539.24 ; PWR2.2 2906.5,4628 LED2.2 LED1.2@2823,4539.24
  Top Layer w30: JP1.2@1135,4845 1135,4600 1200,4535 JDC1.2 1180.43,4524.57 1083.57,4524.57 1050,4491 1050,4042 1075,4017 1163,4017 JP2.2 1266,4015 v1(1356,3925) ; JP4.2 1450,3245 CN1.9 ; D1.A@1767.64,4413.59 1767.64,4534.81 R7.1 1776.53,4543.7 1896.65,4543.7 C6.2
  Bottom Layer w10: v1(2005.5,4170.5) v1@2008.5,4173.5
  Bottom Layer w20: v1(1272,3657) 1272,3841 v1(1356,3925) ; v1@2642,4688 v1(2643,4687) 2643.5,4687.5 2753.5,4687.5 v1(2754,4688) ; v1(2655.33,4180.24) 2655.33,3897.72 2667.04,3886 2932,3886 3098,4052 3192,4052 JP6.2@3200,4060
  other v1: 1190,2590 1260,2590 1330,2590 1400,2590 1470,2590 1540,2590 1610,2590 1680,2590 1750,2590 1820,2590 1890,2590 1960,2590 2030,2590 2100,2590 2170,2590 2240,2590 2310,2590 2380,2590 2450,2590 2520,2590 2590,2590 2660,2590 2730,2590 2800,2590 2870,2590 2940,2590 3010,2590 3080,2590 3150,2590 1225,2660 1295,2660 1365,2660 1435,2660 1505,2660 1575,2660 1645,2660 1715,2660 1785,2660 1855,2660 1925,2660 1995,2660 2065,2660 2135,2660 2205,2660 2275,2660 2345,2660 2415,2660 2485,2660 2555,2660 2625,2660 2695,2660 2765,2660 2835,2660 2905,2660 2975,2660 3045,2660 3115,2660 3185,2660 1120,2730 1190,2730 1260,2730 1330,2730 1400,2730 1470,2730 1540,2730 1610,2730 1680,2730 1960,2730 2730,2730 2800,2730 2870,2730 2940,2730 3010,2730 3080,2730 3150,2730 3220,2730 1015,2800 1365,2800 1435,2800 2835,2800 2905,2800 2975,2800 3045,2800 3325,2800 1050,2870 2450,2870 2520,2870 2590,2870 2800,2870 2870,2870 2940,2870 3010,2870 3080,2870 3360,2870 1015,2940 2555,2940 2625,2940 2695,2940 2765,2940 2835,2940 2905,2940 2975,2940 3325,2940 1050,3010 1540,3010 2660,3010 2730,3010 2800,3010 2870,3010 3360,3010 1015,3080 2835,3080 3325,3080 1050,3150 3360,3150 1015,3220 3325,3220 1050,3290 3290,3290 3360,3290 2205,3360 3325,3360 3360,3430 3325,3500 3290,3570 3360,3570 3325,3640 3360,3710 1295,3780 3325,3780 1330,3850 3290,3850 3360,3850 3325,3920 3360,3990 3325,4060 1680,4130 3360,4130 1015,4200 1715,4200 3325,4200 1050,4270 1120,4270 1190,4270 2100,4270 3360,4270 1015,4340 1085,4340 1155,4340 3325,4340 1050,4410 3290,4410 3360,4410 1015,4480 1085,4480 3325,4480 1050,4550 3360,4550 1015,4620 1085,4620 3325,4620 1050,4690 1120,4690 1190,4690 1260,4690 3360,4690 1015,4760 1085,4760 1155,4760 1505,4760 3325,4760 3360,4830 1015,4900 3325,4900 1050,4970 3150,4970 3220,4970 3290,4970 3360,4970 1687,4997 1155,5040 3115,5040 3185,5040 3255,5040 1190,5110 1260,5110 1330,5110 1400,5110 1470,5110 1540,5110 1610,5110 1680,5110 1750,5110 1820,5110 1890,5110 1960,5110 2030,5110 2100,5110 2170,5110 2240,5110 2310,5110 2380,5110 2450,5110 2520,5110 2590,5110 2660,5110 2730,5110 2800,5110 2870,5110 2940,5110 3010,5110 3080,5110 3150,5110 1155,5180 1225,5180 1295,5180 1365,5180 1435,5180 1505,5180 1575,5180 1645,5180 1715,5180 1785,5180 1855,5180 1925,5180 1995,5180 2065,5180 2135,5180 2205,5180 2275,5180 2345,5180 2415,5180 2485,5180 2555,5180 2625,5180 2695,5180 2765,5180 2835,5180 2905,5180 2975,5180 3045,5180 3115,5180 3185,5180
INT: JP2.6 U1.12 U3.30 | length 1356.6
  Top Layer w10: U1.12 1547.21,3757.79 v1(1568,3737) ; v1(2047,3808) 2085,3846 2085,3942.27 2119,3976.27 2128.03,3976.27 2128.7,3975.6 2151.34,3975.6 U3.30
  Top Layer w20: JP2.6 1175.72,3615 1211.72,3579 1523,3579 1568,3624 v1(1568,3737)
  Bottom Layer w20: v1(1568,3737) 1976,3737 v1(2047,3808)
MVDD: C12.2 C13.2 C15.1 C16.1 C18.1 C21.1 J1.2 R2.2 R9.2 R12.1 U3.18 U3.42 U3.55 U3.63 | length 4258.1
  Top Layer w10: C16.1@1875.53,4210 1885.53,4200 1886.22,4200 2053,4200 2088.5,4164.5 U3.18 2151.5,4164.57 2229.57,4164.57 v1(2230,4165) ; C21.1@2094,3358.53 2094,3434 2172,3512 2253,3512 2344.41,3603.41 2344.41,3928.41 2390.41,3928.41 2444,3982 2444,4028.14 2447,4031.14 2454.37,4038.51 U3.55 2607.49,4038.51 2704,3942 2848.14,3942 2854,3947.86 2854,4059.86 2757,4156.86 2757,4210.53 C13.2 2743.53,4193.86 2737.67,4188 2701,4188 2651,4138 2604,4138 2577.5,4164.5 U3.63 ; C18.1@2754,4830.53 2755,4831.53 R2.2
  Top Layer w20: C16.1@1881.1,4210 1881.1,4206.06 1886.22,4200.94 1886.22,4200 1886.22,4149.12 C15.1@1889.34,4146 ; C15.1@1885.34,4146 C15.1@1889.34,4146 ; R9.2 1891.57,4091.76 1891.57,4092.28 1922.09,4122.79 1922.09,4144.09 v1@1924,4146 ; C15.1@1892.34,4145 1891.34,4144 C15.1@1889.34,4146 ; C15.1@1916,4146 C15.1@1889.34,4146 ; v1(2485,4441) 2559,4515 2647,4515 2694,4562 ; 2703,4544 2694,4553 2694,4562 ; C18.1@2754,4830.53 2753.47,4830 2719,4830 2694,4805 2694,4562 ; J1.2 2821,4965 2821,4833.53 R2.2
  Top Layer w30: 2703,4544 2738.11,4508.89 ; C12.2@2739.57,4282.87 2740.56,4281.88 2738.11,4280.37 2738.11,4508.89 ; 2742.32,4255.79 2738.11,4260 2738.11,4272 2748.2,4282.09 2748.2,4312.25 2748.94,4313 2748.94,4498.06 2738.11,4508.89
  Bottom Layer w20: v1(2230,4165) 2421,4356 2421,4377 v1(2485,4441)
  other v1: 1917,4147
NetC2_1: C2.1 D1.C L1.1 U2.8 | length 1212.9
  Top Layer w20: U2.8 1586.41,5028.28 1598.13,5040 1817.07,5040 1872,4985.07 L1.1@1872,4888
  Top Layer w30: C2.1@1589.13,4536.77 1591.57,4534.34 1591.57,4478.43 v2(1594,4476) 1595.47,4474.53 1595.47,4412.47 D1.C ; L1.1@1883,4834 L1.1
  Bottom Layer w30: v2(1594,4476) 1596,4478 1596,4672 1704,4780 1857.59,4780 1873.59,4796 v2(1879,4796)
NetC2_2: C2.2 U2.1 | length 122.7
  Top Layer w20: C2.2@1586.41,4625.86 U2.1
  Top Layer w30: C2.2@1586.41,4635.2 1595.03,4626.57 C2.2
NetC3_2: C3.2 U1.20 | length 194.4
  Top Layer w10: U1.20 1527.53,3982.53 1596.87,4051.87 C3.2
NetC4_1: C4.1 U1.10 | length 159.8
  Top Layer w10: C4.1 1455,3660.53 1455,3675.21 1507.84,3728.05 U1.10
NetC14_2: C14.2 U3.17 | length 316.6
  Top Layer w10: C14.2 1932,4296 2013,4215 2071,4215 2105.76,4180.24 U3.17
NetCN1_2: CN1.2 R11.1 | length 304.5
  Top Layer w20: v1(2015,3256) 2016.91,3257.91 2016.91,3302.29 R11.1
  Bottom Layer w20: CN1.2 1970,3090 2015,3135 v1(2015,3256)
NetCN1_3: CN1.3 R13.1 | length 208.9
  Top Layer w20: CN1.3 1805,3239 1873.77,3307.77 R13.1
NetCN1_7: CN1.7 CN1.8 CN1.10 R10.1 | length 412.1
  Top Layer w30: CN1.10 CN1.8 1605,3319.03 1622.57,3336.61 R10.1
NetD2_1: D2.1 LS1.2 Q1.3 | length 1014.7
  Top Layer w20: D2.1 2059.99,3031.02 2052.28,3023.3 2051.29,3023.3 2024.2,2996.2 2024.2,2932.02 1997,2904.82 1997,2800 2041,2756 2616,2756 LS1.2
NetLED1_1: LED1.1 R5.1 | length 67.6
  Top Layer w30: R5.1 2819.5,4397.77 2819.5,4462.5 LED1.1
NetLED2_1: LED2.1 R6.1 | length 63.7
  Top Layer w30: R6.1@2908,4395.27 LED2.1@2908,4459
NetPWR1_1: PWR1.1 R2.1 | length 66.7
  Top Layer w30: PWR1.1 R2.1
NetPWR2_1: PWR2.1 R4.1 | length 68
  Top Layer w30: R4.1 2905.5,4771.97 2905.5,4708.24 PWR2.1
NetQ1_1: Q1.1 R14.2 | length 65.8
  Top Layer w20: Q1.1 2104.57,2927.43 R14.2@2162.5,2927.43
NetR7_2: R7.2 R8.1 U2.4 | length 215.9
  Top Layer w20: R8.1 1710.39,4638.23 1710.39,4661.39 1736.41,4687.41 U2.4
  Top Layer w30: R7.2 1696.1,4538.07 1696.1,4623.93 R8.1
PA0: U3.1
PA1: U3.2
PA6: R5.2 U3.7 | length 537.7
  Top Layer w10: U3.7 2344.33,4264.33 2417.71,4337.71 2671.71,4337.71 v1(2672,4338)
  Top Layer w20: v1(2784,4337.71) R5.2
  Bottom Layer w20: v1(2672,4338) 2672.14,4337.86 2783.86,4337.86 v1(2784,4337.71)
PA7: JP6.8 U3.8 | length 1100.6
  Top Layer w10: U3.8@2328.66,4247.18 2328.66,4231.5 U3.8 2328.58,4288.58 2355.41,4315.41 2400,4360 2551,4360 2581,4390 v1(2683,4390)
  Bottom Layer w20: v1(2683,4390) 2739,4446 2979.5,4446 3194.5,4661 JP6.8
PA12: R13.2 U3.38 | length 745.7
  Top Layer w10: R13.2 1936.39,3434.39 2076,3574 2234,3574 2281.34,3621.34 U3.38
PA13: R11.2 U3.39 | length 704.5
  Top Layer w10: R11.2 2022.39,3456.39 2112,3546 2249,3546 2297,3594 2297,3755.21 2296.71,3755.5 2296.71,3817.67 2297.09,3818.04 U3.39
PB0: JP5.2 U3.44 | length 1434.8
  Top Layer w10: U3.44 2375.83,3740.17 2376,3740 2376,3533 2651,3258 2771,3258 3085.13,2943.87 3192.85,2943.87 JP5.2@3202.73,2934
PB1: JP5.3 U3.45 | length 1343.9
  Top Layer w10: U3.45 2391.57,3804.21 2392,3803.79 2392,3554 2659,3287 2832,3287 3072.63,3046.37 3173.38,3046.37 JP5.3@3182.76,3037
PB2: JP5.6 U3.49 | length 1038.5
  Top Layer w10: U3.49@2489.92,3944.1 U3.49 2512.14,3944.02 2518,3938.17 2518,3900 2612,3806 2612,3704 2971,3345 3184,3345 JP5.6
PB3: JP5.7 U3.50 | length 991.7
  Top Layer w10: U3.50 2523.23,3959.77 2539,3944 2539,3925 2651,3813 2651,3711.86 2656.86,3706 2657,3706 2928,3435 JP5.7
PB4: JP5.8 U3.51 | length 942.4
  Top Layer w10: U3.51 2530.48,3975.52 2683,3823 2683,3736 2890,3529 3188,3529 JP5.8
PB5: JP5.9 U3.52 | length 851.6
  Top Layer w10: U3.52 2542.73,3991.27 2899,3635 JP5.9
PB6: R6.2 U3.60 | length 533.6
  Top Layer w10: U3.60 2693.22,4117.25 v1(2714.96,4139) ; v1(2851.91,4290.91) 2855.74,4294.74 2870.51,4294.74 2909.5,4333.73 R6.2
  Bottom Layer w10: v1(2714.96,4139) 2716.93,4139 2746.93,4169 2770,4169 2795.29,4194.29 2851.91,4250.91 v1(2851.91,4290.91)
PB10_LSEi: C19.1 U3.22 X1.1 | length 514.8
  Top Layer w10: X1.1 1885.69,3904.9 1917.9,3904.9 1981,3968 1981,4056.93 2025.86,4101.79 2106.35,4101.79 2106.64,4101.5 U3.22
  Top Layer w20: C19.1 1794.85,3890.21 X1.1
PB11_LSEo: C20.1 U3.23 X1.2 | length 591.7
  Top Layer w10: X1.2@1871.41,3791.79 1934.79,3791.79 1956,3813 1956,3915.21 2002,3961.21 2002,4048 2039.76,4085.76 U3.23
  Top Layer w20: X1.2 1871.41,3791.79 1881.1,3782.1 C20.1
PB13_HSEi: C22.1 U3.26 Y1.1 | length 1597.2
  Top Layer w10: U3.26 2151.5,4038.43 2167.17,4038.43 2167.84,4037.76 2209.45,4037.76 2210.21,4037 2225,4037 2258,4070 v1(2343,4070)
  Top Layer w30: C22.1@2222.59,2867 2314.93,2867 2342.93,2895 Y1.1
  Bottom Layer w20: v1(2343,4070) 2344.71,4068.29 2364.93,4068.29 2422,4011.22 2422,2962 Y1.1
PB14_HSEo: C23.1 U3.27 Y1.2 | length 1713.1
  Top Layer w10: C23.1 1940,3646 1983,3689 1983,3921 2084.76,4022.76 U3.27 2193.67,4022.76 2203.24,4022.76 2206,4020 v1(2349,4020)
  Bottom Layer w20: v1(2349,4020) 2397,3972 2397,3151.88 2355,3109.88 Y1.2
PC1: JP6.5 U3.57 | length 878.2
  Top Layer w10: U3.57 2627.99,4070.01 2686,4012 v1(2717,4012)
  Bottom Layer w20: v1(2717,4012) 2803,4012 3145.52,4354.52 3194.52,4354.52 JP6.5@3200,4360
PC2: JP6.6 U3.58 | length 889.7
  Top Layer w10: U3.58 2652.25,4085.76 2682,4056 v1(2778.41,4056)
  Bottom Layer w20: v1(2778.41,4056) 2781.12,4056 3185.12,4460 JP6.6@3200,4460
PC3: JP6.7 U3.59 | length 917.2
  Top Layer w10: U3.59 2490.08,4101.43 2723.57,4101.43 v1(2727,4098)
  Bottom Layer w20: v1(2727,4098) 2755,4098 2904.96,4247.96 3002,4345 3002,4369.5 3192.5,4560 JP6.7@3200,4560
PC4: JP6.9 U3.11 | length 1163.3
  Top Layer w10: U3.11 2281.34,4275.34 2386.18,4380.18 2535.18,4380.18 2605,4450 v1(2674,4450)
  Bottom Layer w20: v1(2674,4450) 2729,4505 2888,4505 3140.02,4757.02 3197.02,4757.02 JP6.9@3200,4760
PC5: JP6.10 U3.12 | length 1228.8
  Top Layer w10: U3.12 2265.67,4231.5 2265.67,4289.67 2372,4396 2514,4396 2613,4495 v1(2670,4495)
  Bottom Layer w20: v1(2670,4495) 2717,4542 2841,4542 3148.48,4849.48 3189.48,4849.48 JP6.10@3200,4860
PC14: JP6.3 U3.53 | length 940.1
  Top Layer w10: U3.53 2558.98,4007.02 2686,3880 2891,3880 2942,3931 v1(2942,3961)
  Bottom Layer w20: v1(2942,3961) 2942,4036 3066,4160 JP6.3@3200,4160
PC15: JP6.4 U3.54 | length 945
  Top Layer w10: U3.54 2585.24,4022.76 ; 2589,4021 2704,3906 2849,3906 v1(2894,3951)
  Bottom Layer w20: v1(2894,3951) 2894,4027 3127,4260 JP6.4@3200,4260
PD2: JP5.4 U3.47 | length 1136.3
  Top Layer w10: U3.47 2423.07,3821.33 2459,3785.4 2459,3752 3065.63,3145.37 3184.97,3145.37 JP5.4@3187.34,3143
PD3: JP5.5 U3.48 | length 1061.2
  Top Layer w10: U3.48 2438.74,3892.76 2438.74,3877.09 2438.07,3876.42 2438.07,3833.93 2487,3785 2487,3769 3021,3235 JP5.5@3182.63,3235
PD4: U3.9
PD5: U3.10
PWRKEY: JP3.1 U3.33 | length 1156.2
  Top Layer w10: JP3.1 1854,2888.5 2059.17,3093.67 2059.17,3111.17 v1(2063,3115) ; v1(2140,3622) 2161,3643 2161,3721 2202.6,3762.6 U3.33
  Bottom Layer w10: v1(2063,3115) 2063,3545 v1(2140,3622)
RX0: JP4.3 U3.4 | length 2015.3
  Top Layer w10: v1(2208,3988) 2210,3990 2267.1,3990 2273.71,3983.39 2354.39,3983.39 2391.57,4020.57 2391.57,4076.43 U3.4
  Bottom Layer w20: JP4.3 1213,3145 1262,3194 1262,3441 1510,3689 2003,3689 2171,3857 2171,3951 v1(2208,3988)
RX1: JP3.3 U3.6 | length 1867
  Top Layer w10: v1(2285,4152.65) 2316.47,4152.65 2360.16,4196.33 2360.16,4231.35 U3.6
  Bottom Layer w20: JP3.3 1654,2947 1698,2991 2049,2991 2271,3213 2271,4135.94 2285,4149.94 v1(2285,4152.65)
SCL: JP2.3 R3.1 U1.23 U3.28 | length 1354.2
  Top Layer w10: U1.23 1468.47,4014.47 v1(1513,4059) ; v1(2027,3904) 2030.83,3907.83 2030.83,3937.83 2100.02,4007.02 U3.28
  Top Layer w30: R3.1 1513,4116.17 v1(1513,4059)
  Bottom Layer w20: JP2.3 1232,3915 1376,4059 v1(1513,4059) 1784,4059 1939,3904 v1(2027,3904)
SDA: JP2.4 R1.1 U1.24 U3.29 | length 1504.3
  Top Layer w10: R1.1 1424.39,4112.77 v1(1424.39,4004.61) 1448.79,3980.21 U1.24 ; v1(2029,3856) 2033,3856 2065,3888 2065,3946 2110.27,3991.27 U3.29
  Top Layer w30: v1(1424.39,4004.61) 1427.39,4007.61 R1.1
  Bottom Layer w20: JP2.4 1187.38,3815 1376.99,4004.61 v1(1424.39,4004.61) 1769.39,4004.61 1913,3861 1974,3861 1979,3856 v1(2029,3856)
TX0: JP4.4 U3.3 | length 2106.2
  Top Layer w10: v1(2240,3954.65) 2365.65,3954.65 2408,3997 2408,4116.56 2407.32,4117.23 U3.3
  Bottom Layer w20: JP4.4 1238,3045 1344,3151 1344,3426 1554.5,3636.5 2029.5,3636.5 2194,3801 2194,3840.43 2215,3861.43 2215,3926.94 2240,3951.94 v1(2240,3954.65)
TX1: JP3.2 U3.5 | length 1891.5
  Top Layer w10: v1(2346,4121) 2375.83,4150.83 U3.5
  Bottom Layer w20: JP3.2 1754,2802.72 1765.72,2791 1913,2791 2303,3181 2303,4107.37 2314.72,4119.09 2344.09,4119.09 v1(2346,4121)
VBAT: C17.2 R12.2 U3.21 | length 503.3
  Top Layer w10: v1(1942,3977.21) 1942,4050.39 2008.86,4117.25 U3.21
  Top Layer w20: C17.2@1881.45,3963.87 1892.88,3975.3 1940.09,3975.3 v1(1942,3977.21)
  Bottom Layer w20: R12.2 1892,4027.21 v1(1942,3977.21)
Vin+: C1.1 JDC1.1 JP1.1 U2.7 | length 891.5
  Top Layer w20: v1(1635,4997) 1635.7,4996.3 1635.7,4949.59 U2.7
  Top Layer w30: JDC1.1@1475,4530 JDC1.1 1450,4535 1341,4644 JP1.1 1362,4885 1402.23,4925.23 1502.8,4925.23 1503,4925.43 v1(1503,4997)
  Bottom Layer w30: v1(1503,4997) v1(1635,4997)
pads on no net: CN1.6 IC1.4 JDC1.3 JP3.4 JP4.5 U1.2 U1.3 U1.4 U1.5 U1.6 U1.7 U1.14 U1.15 U1.16 U1.17 U1.19 U1.21 U1.22 U1.25 U2.2 U2.3 U2.5 U2.9 U2.10 U2.11 U2.12 U2.13 U2.14 U2.15 U2.16 U2.17 U3.13 U3.14 U3.15 U3.16 U3.24 U3.25 U3.31 U3.32 U3.35 U3.36 U3.37 U3.40 U3.41 U3.61 U3.62
copper on no net:
  other v3: 1045,2618 3320,2626 1033,5139 3323,5148

## Polygon pours and split planes (outlines as drawn)
GND on Bottom Layer "GND_L02_P002" (solid, remove dead copper, pour order 2): 935,5233 3424,5233 3424,2539 3421,2542 932,2542
GND on Top Layer "GND_L01_P000" (solid, remove dead copper, pour order 0): 924,5254 930,5248 3441,5248 3441,2527 3431,2517 924,2517

## Keep-outs
Keep-Out Layer:
  lines w10: 923,2518 923,5250 3440,5250 3440,2518 923,2518

## Other copper
Top Layer:
  region net 5V: 1748,4652 1789,4693 1950,4693 2049,4792 2049,5005 2088,5044 2195,5044 2227,5012 2227,4517 2212,4502 2061,4502 2044,4519 2044,4588 2020,4612 1810,4612 1795,4597
  region net 3.3V: 1875,3221 1940,3221 2709,3221 2737,3193 2737,3111 2731,3105 2554,3105 2500,3159 2282,3159 2239,3116 2239,3038 2198,2997 2163,2997 2138,3022 2138,3101 2080,3159 1921,3159
  region net 3.3V: 1119,4153 1143,4177 1253,4177 1289,4213 1460,4213 1474,4227 1474,4295 1496,4317 1586,4317 1597,4306 1597,4257 1581,4241 1548,4241 1540,4233 1540,4168 1534,4162 1376,4162 1287,4073 1126,4073 1119,4080 1119,4084
  region net MVDD: 2860,4985 2837,5008 2719,5008 2684,4973 2684,4526 2721,4526 2726,4531 2726,4798 2738,4810 2843,4810 2860,4827
  region net 3.3V: 2350,4821 2391,4821 2400,4812 2400,4665 2431,4634 2635,4634 2647,4622 2647,4583 2638,4574 2411,4574 2398,4561 2348,4561 2335,4574 2335,4806
  region net 3.3V: 2882,4999 2893,5010 3039,5010 3053,4996 3053,4043 3092,4004 3244,4004 3259,3989 3259,3914 3249,3904 2994,3904 2966,3932 2966,4802 2956,4812 2886,4812 2882,4816 2882,4998
  region net 5V: 2435,4908 2445,4918 2654,4918 2660,4912 2660,4756 2644,4740 2508,4740 2489,4721 2447,4721 2435,4733
  region net NetC2_1: 1612,5050 1913,5050 1955,5008 1925,4978 1925,4970 1835,4970 1771,5034
  region net Vin+: 1271,5015 1517,5015 1530,5002 1530,4899 1525,4894 1428,4894 1423,4889 1423,4677 1505,4595 1505,4428 1493,4416 1342,4416 1322,4436 1322,4723 1258,4787 1258,5002
Bottom Layer:
  region net 5V: 2210.5,5016.5 2275.5,4951.5 2546.5,4951.5 2574.5,4923.5 2574.5,4577.5 2631.5,4520.5 2631.5,3872.5 2714.5,3789.5 3101.5,3789.5 3140.5,3828.5 3221.5,3828.5 3249.5,3800.5 3249.5,3744.5 3225.5,3720.5 2682.5,3720.5 2574.5,3828.5 2574.5,4466.5 2462.5,4578.5 2462.5,4772.5 2425.5,4809.5 2264.5,4809.5 2223.5,4768.5
  region net 5V: 1748,4652 1789,4693 1859,4693 1859,4616 1863,4612 1810,4612 1795,4597 1748,4597
  region net 5V: 2049,5005 2088,5044 2195,5044 2234.5,5004.5 2234.5,4522.5 2209.18,4502 2061,4502 2044,4519 2044,4588 2020,4612 1849,4612 1833,4628 1833,4667 1859,4693 1951,4693 2049,4791
  region net 3.3V: 2884,4997 2895,5008 3022,5008 3026,5004 3026,4791 2808,4573 2597,4573 2591,4579 2591,4619 2605,4633 2777,4633 2884,4740 2884,4996
  region net 3.3V: 1119,4153 1143,4177 1253,4177 1289,4213 1460,4213 1474,4227 1474,4295 1496,4317 1586,4317 1597,4306 1597,4257 1581,4241 1540,4200 1540,4168 1534,4162 1376,4162 1287,4073 1126,4073 1119,4080 1119,4084
  region net Vin+: 1273,5011 1519,5011 1532,4998 1532,4895 1527,4890 1430,4890 1425,4885 1425,4673 1507,4591 1507,4424 1495,4412 1344,4412 1324,4432 1324,4719 1260,4783 1260,4998

## Silkscreen, mask and mechanical layers (free items; w line width, h text height)
Top Overlay:
  text "PC5" at 3317,4836.64 h60
  text "PC4" at 3317,4732.64 h60
  text "PA7" at 3317,4640 h60
  text "PC3" at 3317,4540.64 h60
  text "PC2" at 3317,4438.64 h60
  text "PC1" at 3317,4334.64 h60
  text "PC15" at 3317,4241.64 h60
  text "3.3V" at 943,4162.64 h60
  text "PC14" at 3317,4140.64 h60
  text "GND" at 3317,4054.64 h60
  text "GND" at 937,3999.64 h60
  text "SCL" at 950.48,3887.64 h60
  text "3.3V" at 3318,3876.64 h60
  text "SDA" at 942.6,3800.64 h60
  text "+5V" at 3315,3710.64 h60
  text "AD0" at 948.65,3691.64 h60
  text "PB5" at 3315,3606.64 h60
  text "INT" at 965.19,3594 h60
  text "PB4" at 3315,3514 h60
  text "PB3" at 3315,3414.64 h60
  text "3.3V" at 932,3402.64 h60
  text "PB2" at 3315,3312 h60
  text "CLK" at 1752,3251.64 h60
  text "GND" at 930,3225.64 h60
  text "PD3" at 3315,3208.64 h60
  text "3.3V" at 1971,3176.64 h60
  text "GND" at 1331,3171.64 h60
  text "RXD" at 934.33,3126 h60
  text "PD2" at 3315,3115 h60
  text "DIO" at 1977,3081.64 h60
  text "RST" at 1342,3061.64 h60
  text "TXD" at 937.32,3021 h60
  text "PB1" at 3315,3014 h60
  text "PB0" at 3315,2928.64 h60
  text "NC" at 966,2923.64 h60
  text "EN" at 968,2824 h60
  text "GND" at 3315,2744.64 h60
  text "TXD" at 1783,2615 h60 r90
  text "PWR" at 1886,2613 h60 r90
  text "RXD" at 1679,2612 h60 r90

## Text inside footprints (layer, text, board x,y; h text height)
LS1: Top Overlay "+" at 2671.5,3084.5 h40 r270